# Altium PCB 2015_AdaptateurBluetooth.PcbDoc
Units mil, origin at the board's own origin, x right, y up, seen from the top; angles counter-clockwise.
Board outline 1360.03 x 730.03 mil, 4 copper layers (1-TOP, 2-SIGNAL, 3-GND, 4-BOT), stack 68 mil thick; 3 components, 6 nets, 18 pads, 12 vias.
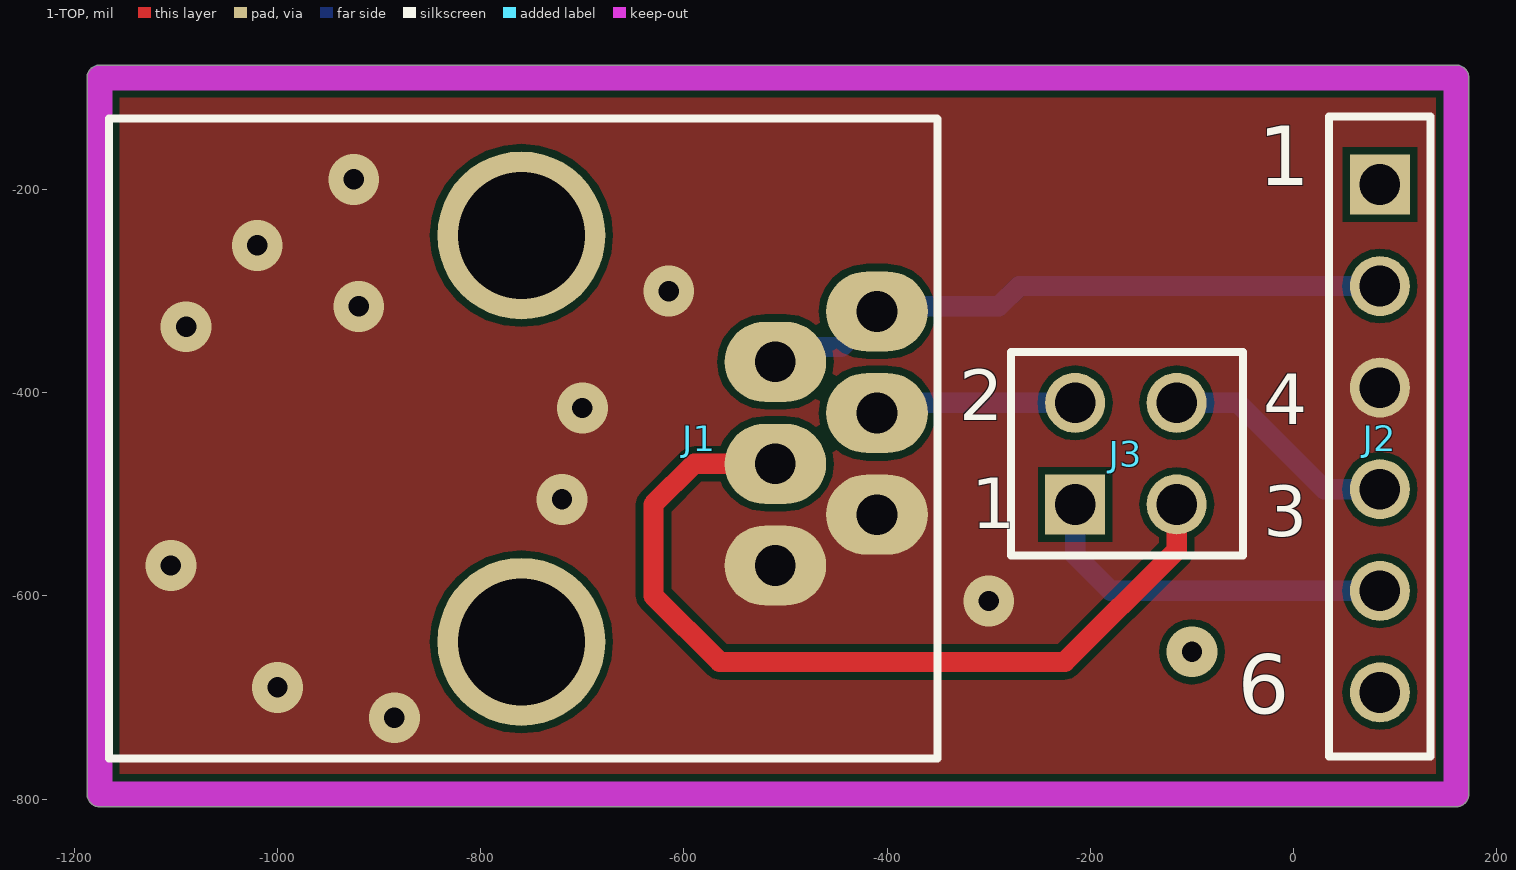
[diagram p0: 1-TOP view]
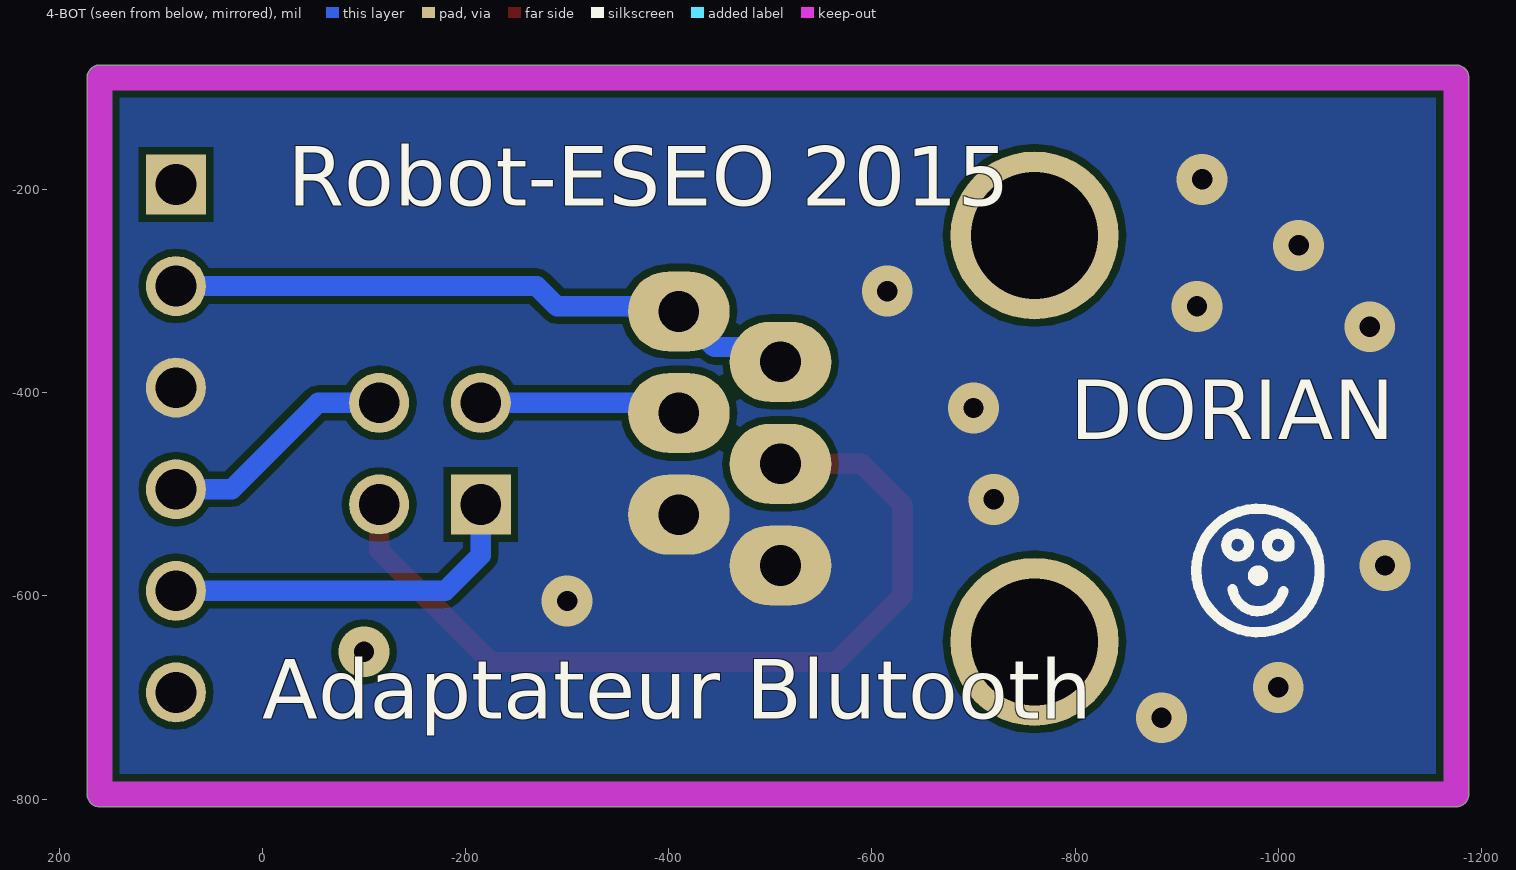
[diagram p1: 4-BOT view, seen from below]
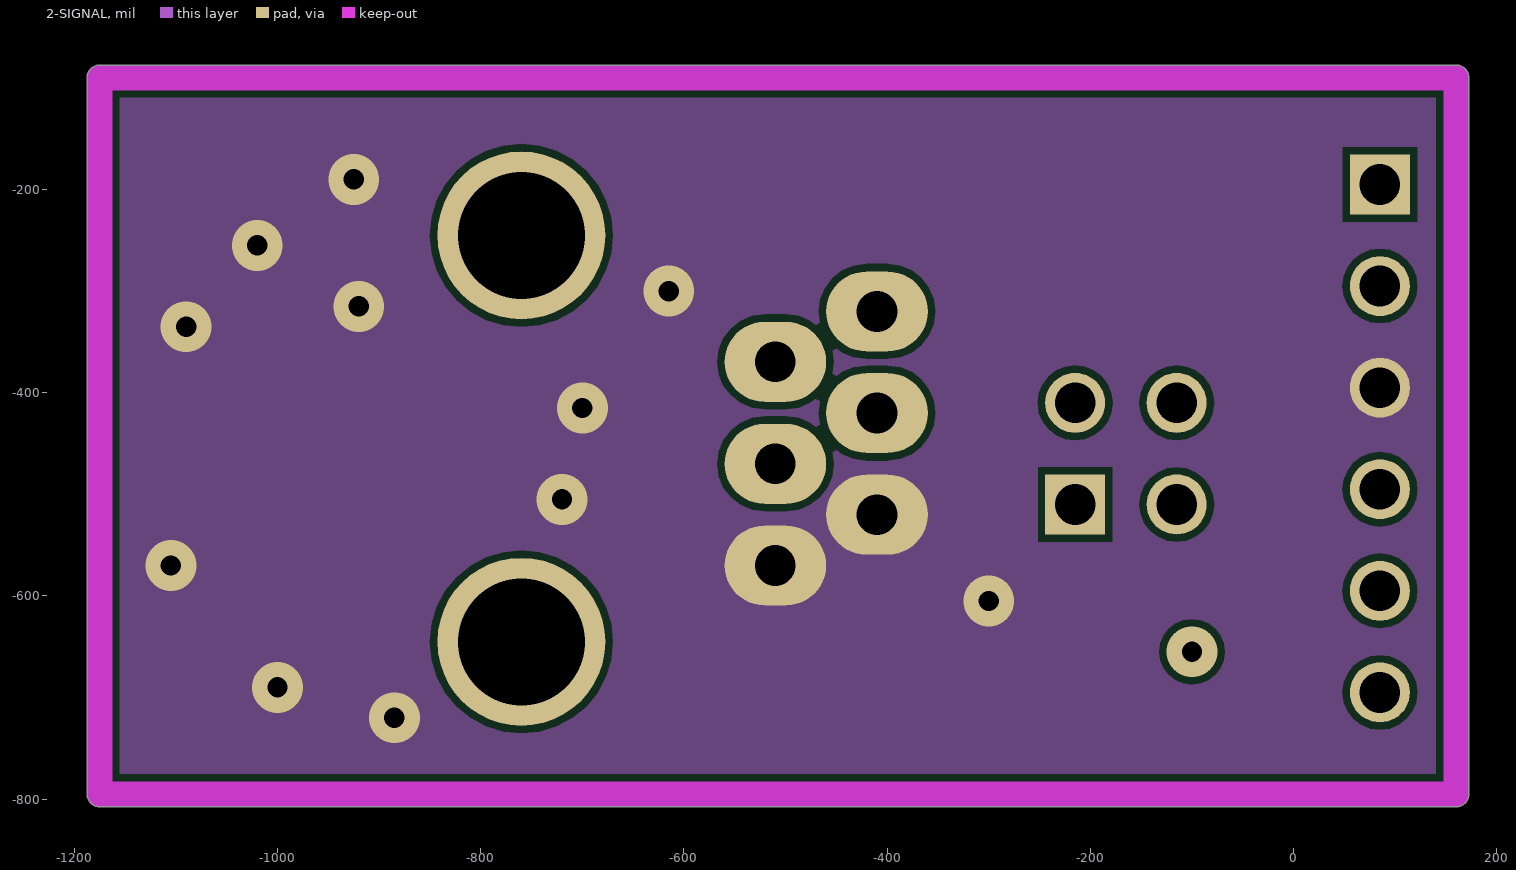
[diagram p2: 2-SIGNAL]
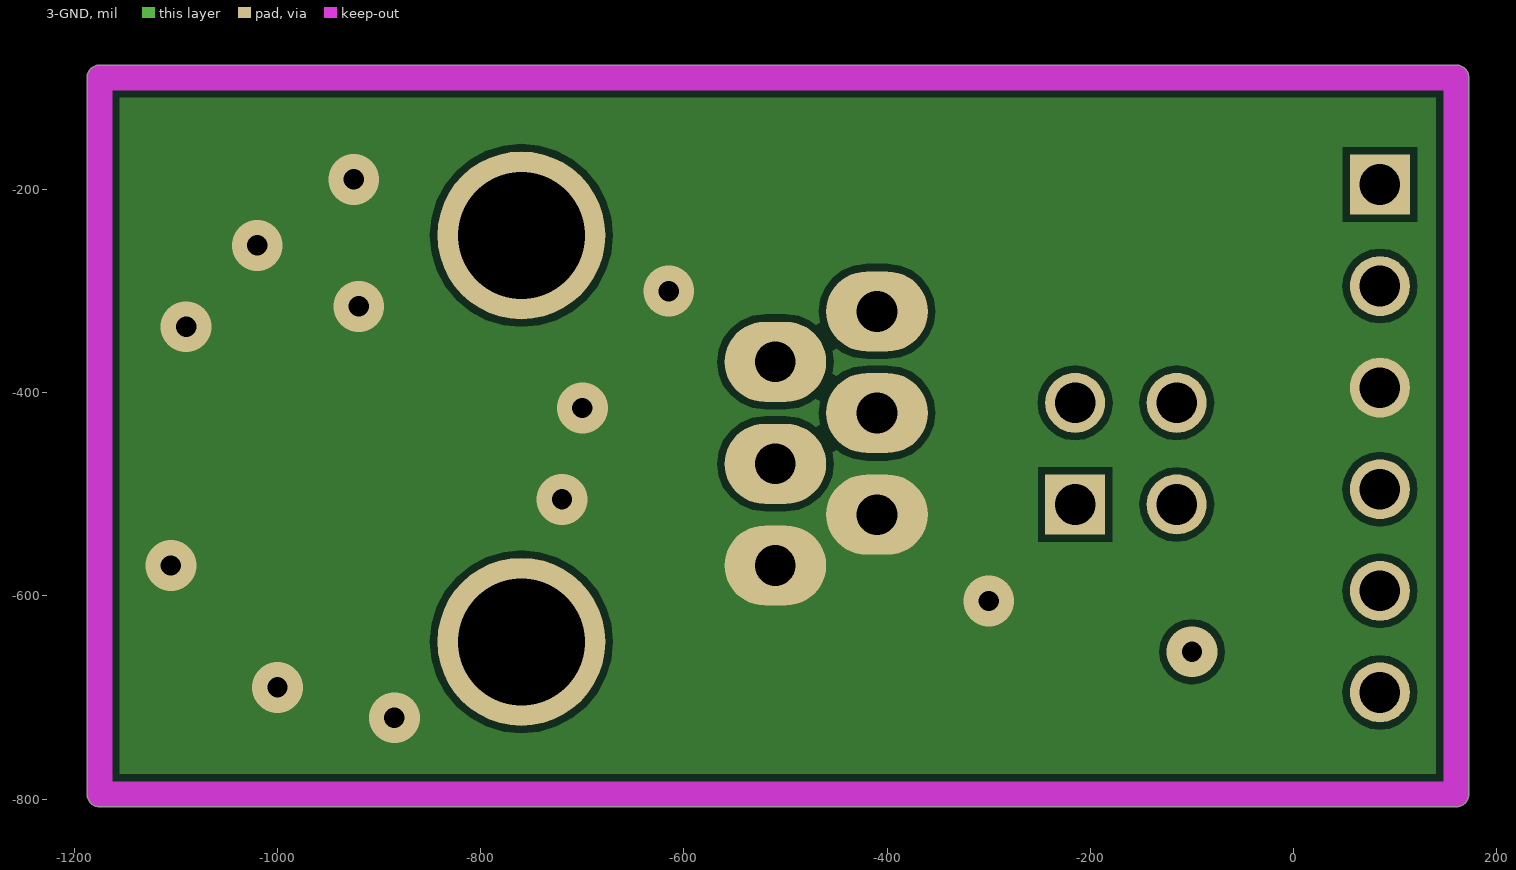
[diagram p3: 3-GND]
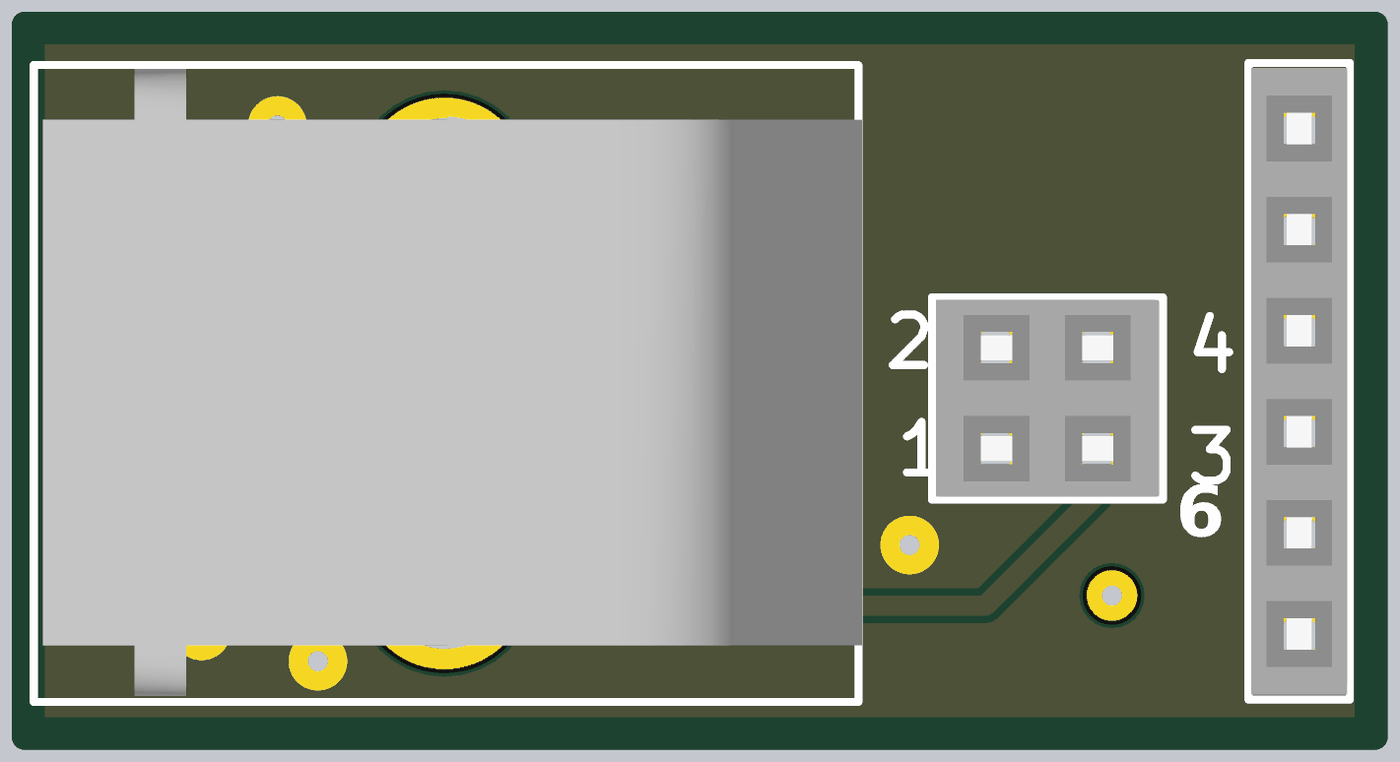
[diagram p4: 3D render of the assembled board from above, using the file's embedded part models]

## Layer stack, top to bottom
Top Solder: solder mask 0.4, Solder Resist, Dk 3.5
1-TOP: signal copper 1.4
Dielectric1: core 20.8, FR-4, Dk 4.8
2-SIGNAL: signal copper 1.4
Dielectric2: prepreg 20.8, FR-4, Dk 4.8
3-GND: signal copper 1.4
Dielectric3: core 20.8, FR-4, Dk 4.8
4-BOT: signal copper 1.4
Bottom Solder: solder mask 0.4, Solder Resist, Dk 3.5

## Board outline
-1175,-807.52 cw(c-1175,-795) -1187.52,-795 -1187.52,-90 cw(c-1175,-90) -1172.79,-77.68 -422.21,-77.68 cw(c-420,-90) -420,-77.48 160,-77.48 cw(c160,-90) 172.52,-90 172.52,-795 cw(c160,-795) 160,-807.52

## Design rules (kind name [scope] priority, off if disabled: settings)
Clearance Clearance_4 [InNamedPolygon('GND_TOP') Or  InNamedPolygon('3-GND') Or  InNamedPolygon('2-GND') Or  InNamedPolygon('4-GND')] p1: gap=15
Clearance Clearance_3 [InNamedPolygon('4-GND') Or  InNamedPolygon('GND_TOP') Or  InNamedPolygon('2-GND') Or  InNamedPolygon('3-GND')] p2: gap=10
Clearance Clearance_2 [InNamedPolygon('4-GND') Or  InNamedPolygon('2-GND') Or  InNamedPolygon('3-GND') Or  InNamedPolygon('1-GND') Or  InNamedPolygon('2-GND24')] p3: gap=10
Clearance Clearance_1 [InNamedPolygon('2-GND') Or  InNamedPolygon('3-GND') Or  InNamedPolygon('1-GND') Or  InNamedPolygon('4-GND')] p4: gap=10
Clearance [All] p5: gap=7
FabricationTestpoint [(IsPad And (OnTopLayer Or OnBottomLayer))] p1: side=3 testpointundercomponent=TRUE minsize=40 maxsize=100 preferedsize=60 minholesize=0 maxholesize=40 preferedholesize=32 testpointgrid=1 allowsidetop=TRUE allowsidebottom=TRUE usegrid=TRUE gridtolerance=0.01
HoleSize [All] p1: absolutevalues=TRUE maxlimit=200 minlimit=1 maxpercent=80.000 minpercent=20.000
PlaneConnect [All] p1: planeconnectstyle=Direct reliefexpansion=20 reliefentries=4 reliefconductorwidth=10 reliefairgap=10
PolygonConnect [All] p1: connectstyle=Direct reliefconductorwidth=10 reliefentries=4 polygonreliefangle="90 Angle" airgapwidth=10
RoomDefinition 2015_AdaptateurBluetooth [InComponentClass('2015_AdaptateurBluetooth')] p1: confinementstyle=ConfineIn formatcopy=TRUE lockcomponents=FALSE outline 435,-825 1515,-825 1515,110 435,110
RoutingVias [All] p1: holewidth=28 width=50 viastyle="Through Hole" minholewidth=28 minwidth=50 maxholewidth=28 maxwidth=50
SilkToSolderMaskClearance SilkscreenOverComponentPads [IsPad] p1: minsilkscreentomaskgap=10 clearancetoexposedcopper=TRUE
SolderMaskExpansion [All] p1: expansion=4
Width [All] p1: maxlimit=200 minlimit=10 preferedwidth=15
25 further rules are at their usual default settings.

## Components (designator, comment, footprint, x,y, rotation, side; value= is the part's Value field where it differs from the comment)
J1 "RJ12_6/6" RJ12_6/6 -410,-520 r180 top
J2 "BARRETTE6" BARRETTE_6_F_D 85,-195 r270 top
J3 "BARRETTE2X2" BARRETTE_2X2_F_D -215,-510 r0 top

## Footprints (in the part's own frame and the unit in brackets; to place one, negate y for a bottom-side part, rotate by r counter-clockwise, add the part's x,y. Pads: shape width x height; smd on the part's side, far side on the other; paste and mask are expansions set on the pad)
BARRETTE_2X2_F_D [mm] "BARRETTE 2 CONTACTS ; 2 RANGEES ; DROITE ; FEMELLE ; ESPACEMENT BROCHES = 2.54 mm"
  rect 1.5x1.5 hole 1.016: 1(0,0)
  round 1.5 hole 1.016: 2(0,2.54) 3(2.54,0) 4(2.54,2.54)
  silkscreen extent -1.6,-1.27 4.2,3.81, body extent -1.5,-1.2 4.09,3.75, height 8.5
BARRETTE_6_F_D [mm] "BARRETTE 6 CONTACTS ; 1 RANGEE ; DROITE ; FEMELLE ; ESPACEMENT BROCHES = 2.54 mm"
  rect 1.5x1.5 hole 1.016: 1(0,0)
  round 1.5 hole 1.016: 2(2.54,0) 3(5.08,0) 4(7.62,0) 5(10.16,0) 6(12.7,0)
  silkscreen extent -1.7,-1.27 14.3,1.27, body extent -1.57,-1.2 14.17,1.21, height 8.5
RJ12_6/6 [mm] "RJ12 ; 6P/6C ; BAS PROFIL ; COUDE ; ESPACEMENT BROCHES = 2.54 mm"
  oval 2.54x2 hole 1.016: 1(0,-5.08) 2(2.54,-3.82) 3(0,-2.54) 4(2.54,-1.27) 5(0,0) 6(2.54,1.27)
  round 4.2 hole 3.175: FIX1(8.89,3.18) FIX2(8.89,-6.98)
  silkscreen extent -1.51,-9.9 19.2,6.1, body extent -1.6,-9.8 18.97,5.95, height 16

## Part data
J1: "EMBASE RJ12_6/6 COUDEE"
J2: "Header, 6-Pin"
J3: "Header, 2-Pin, Dual row"

## Via types
v1: diameter 50, hole 20, 1-TOP to 4-BOT, 12 vias

## Nets (pads, with @x,y where several pads share a name; then routed paths per layer and width w, separated by ;. In a path a pad name is that pad's centre, name@x,y a point inside that pad or via, vN(x,y) a via of type N, cw(c..) or ccw(c..) an arc to the next point about the centre after c; other vN are vias at no path point)
GND: J1.5 J1.6 J2.3
  other v1: -885,-720 -1000,-690 -300,-605 -1105,-570 -720,-505 -700,-415 -1090,-335 -920,-315 -615,-300 -1020,-255 -925,-190
NetJ1_3: J1.3 J3.2 | length 192.1
  4-BOT w20: J1.3@-405,-415 -400,-410 J3.2
NetJ1_4: J1.4 J3.3 | length 859.1
  1-TOP w20: J1.4 -590,-470 -630,-510 -630,-600 -565,-665 -225,-665 -115,-555 J3.3
RX: J2.4 J3.4 | length 235.2
  4-BOT w20: J3.4 -55,-410 30,-495 J2.4
TX: J2.5 J3.1 | length 359.5
  4-BOT w20: J3.1@-215,-515 -215,-560 -180,-595 J2.5
VCC: J1.1 J1.2 J2.2 | length 604.9
  4-BOT w20: J1.2@-495,-355 -445,-355 J1.1 -405,-315 -290,-315 -270,-295 J2.2
pads on no net: J1.FIX1 J1.FIX2 J2.1 J2.6
copper on no net:
  other v1: -100,-655

## Polygon pours and split planes (outlines as drawn)
GND on 1-TOP "1-TOP-No Net" (solid, pour order 6): -1175,-807.52 cw(c-1175,-795) -1187.52,-795 -1187.52,-90 cw(c-1175,-90) -1172.79,-77.68 -422.21,-77.68 cw(c-420,-90) -420,-77.48 160,-77.48 cw(c160,-90) 172.52,-90 172.52,-795 cw(c160,-795) 160,-807.52
GND on 2-SIGNAL "1-TOP-No Net1" (solid, pour order 8): -1175,-807.52 cw(c-1175,-795) -1187.52,-795 -1187.52,-90 cw(c-1175,-90) -1172.79,-77.68 -422.21,-77.68 cw(c-420,-90) -420,-77.48 160,-77.48 cw(c160,-90) 172.52,-90 172.52,-795 cw(c160,-795) 160,-807.52
GND on 3-GND "1-TOP-No Net2" (solid, pour order 10): -1175,-807.52 cw(c-1175,-795) -1187.52,-795 -1187.52,-90 cw(c-1175,-90) -1172.79,-77.68 -422.21,-77.68 cw(c-420,-90) -420,-77.48 160,-77.48 cw(c160,-90) 172.52,-90 172.52,-795 cw(c160,-795) 160,-807.52
GND on 4-BOT "1-TOP-No Net3" (solid, pour order 12): -1175,-807.52 cw(c-1175,-795) -1187.52,-795 -1187.52,-90 cw(c-1175,-90) -1172.79,-77.68 -422.21,-77.68 cw(c-420,-90) -420,-77.48 160,-77.48 cw(c160,-90) 172.52,-90 172.52,-795 cw(c160,-795) 160,-807.52

## Keep-outs
Keep-Out Layer:
  lines w24.61: -1175,-90 -420,-90
  lines w25: -1175,-90 -1175,-795 160,-795 160,-90 -420,-90

## Silkscreen, mask and mechanical layers (free items; w line width, h text height)
Top Overlay:
  text "1" at -35,-215 h100
  text "6" at -55,-735 h100
Bottom Overlay:
  circle w10: c-980,-580 r5
  circle w10: c-980,-575 r60.83
  circle w10: c-1000,-550 r11.18
  circle w10: c-960,-550 r11.18
  lines w10: -1005,-595 ccw(c-980.08,-589.61) -954.84,-593.21
  text "Robot-ESEO 2015" at -25,-235 h100
  text "DORIAN" at -795,-465 h100
  text "Adaptateur Blutooth" at 0,-740 h100

## Text inside footprints (layer, text, board x,y; h text height)
J3: Top Overlay "3" at -29.96,-541.5 h50; Top Overlay "4" at -29.96,-431.26 h50; Top Overlay "2" at -329.17,-427.32 h50; Top Overlay "1" at -317.36,-533.62 h50